# EAGLE board main (EAGLE 5.11)
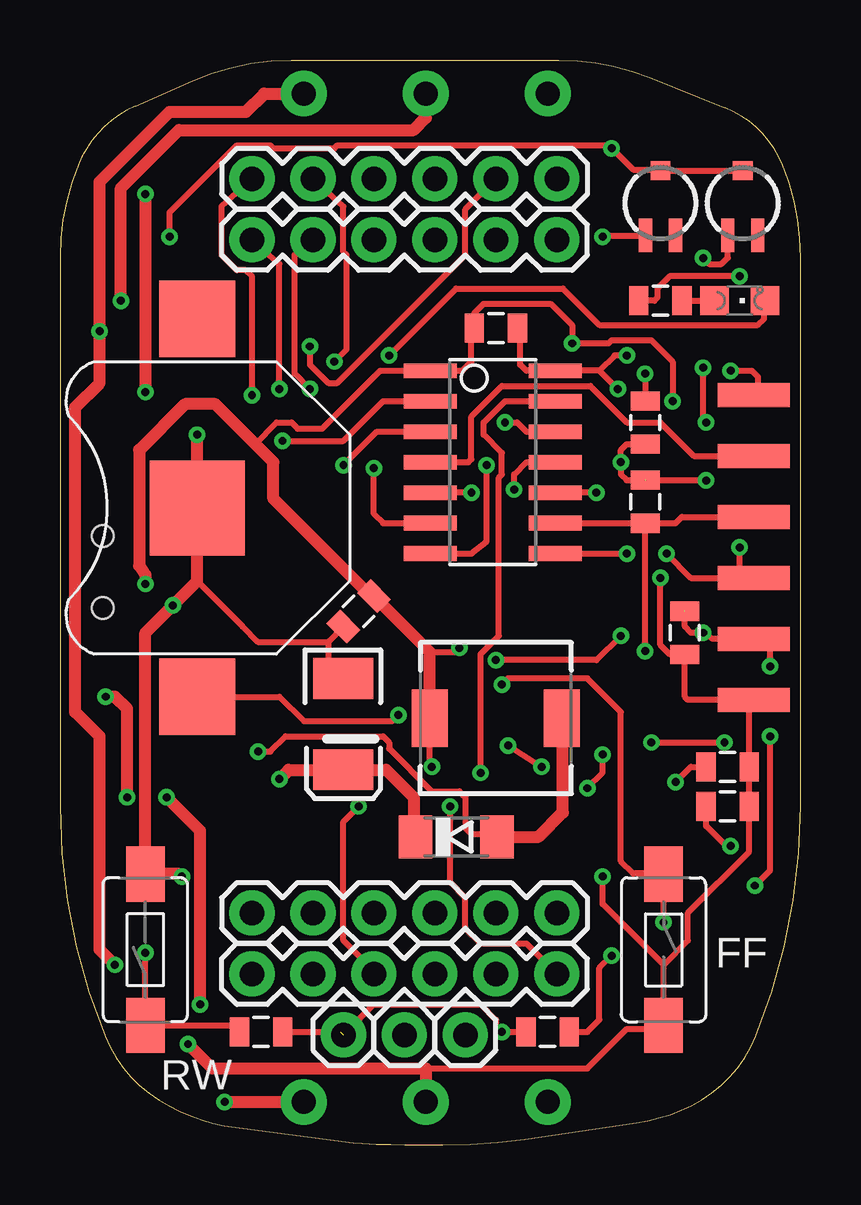
[diagram p0: board, top side]
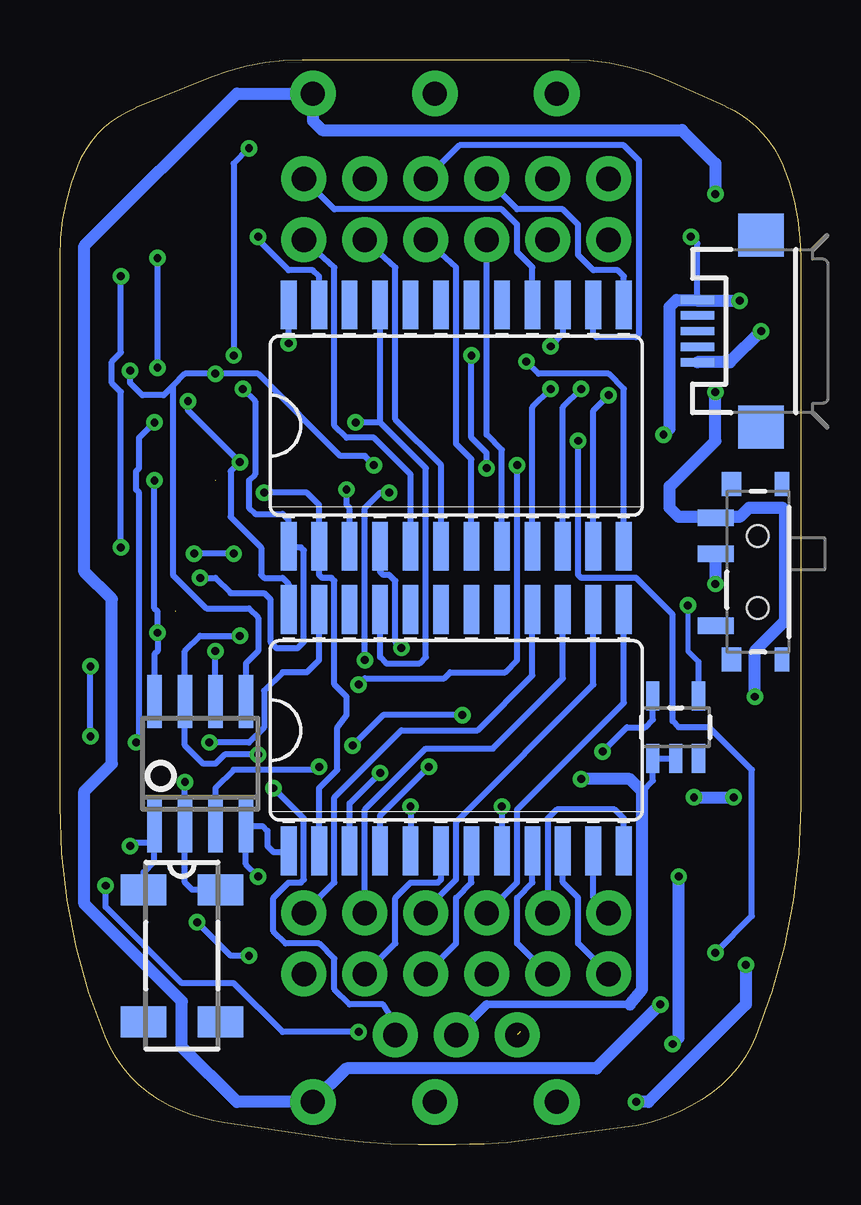
[diagram p1: board, bottom side, seen from below]

Size 30.86 x 45.21 mm. Coordinates in mm from the lower left corner, seen from the top.
Outline: 0.75,40.83 arc22 0,37 0,14.1 arc22 1.88,4.51 arc41 4.55,1.62 arc19 6.85,0.79 12.22,0.09 12.59,0.05 arc4 14.38,0 15.94,0 arc7 19.37,0.22 24.01,0.92 arc19 26.31,1.62 arc41 28.98,4.51 arc22 30.86,14.1 30.86,37 arc22 30.11,40.83 arc46 27.7,43.22 24.55,44.48 arc22 20.78,45.21 9.64,45.21 arc24 5.53,44.34 3.13,43.28 arc44 0.75,40.83
Copper layers (1*16): Top 0.0356mm / dielectric 1.5011mm / Bottom 0.0356mm
Design rules "LaenPCBOrder *": minimum track width 6mil, minimum drill 13mil, track to track 6mil, track to pad 6mil, pad to pad 6mil, via to via 6mil, smd to smd 6mil, copper to edge 15mil, drill to drill 6mil, minimum pad ring 7mil, minimum via ring 7mil, stop-mask expansion 4mil, vias tented up to drill 14mil, thermal gap 10mil

## Footprints (pad centres in the part's own frame; a part is rotated, then mirrored left to right if it is on the bottom)
BATTCON_12MM = smd 3.962 x 3.962: GND 0,0 | smd 3.175 x 3.175: PWR@1 -7.874,0; PWR@2 7.874,0
0805 = smd 0.8 x 1.2: 1 -0.9,0; 2 0.9,0
EIA3528-KIT = smd 1.7 x 2.5: A 1.9,0; C -1.9,0
SOD80C = smd 1.4 x 1.8: A 1.7,0; C -1.7,0
SOIC14 = smd 0.61 x 2.21: 1 -3.81,-2.603; 2 -2.54,-2.603; 3 -1.27,-2.603; 4 0,-2.603; 5 1.27,-2.603; 6 2.54,-2.603; 7 3.81,-2.603; 8 3.81,2.603; 9 2.54,2.603; 10 1.27,2.603; 11 0,2.603; 12 -1.27,2.603; 13 -2.54,2.603; 14 -3.81,2.603
SO-08 = smd 0.6 x 2.2: 1 -1.905,-2.6; 2 -0.635,-2.6; 3 0.635,-2.6; 4 1.905,-2.6; 5 1.905,2.6; 6 0.635,2.6; 7 -0.635,2.6; 8 -1.905,2.6
SO24L = smd 0.66 x 2.032: 1 -6.985,-5.029; 2 -5.715,-5.029; 3 -4.445,-5.029; 4 -3.175,-5.029; 5 -1.905,-5.029; 6 -0.635,-5.029; 7 0.635,-5.029; 8 1.905,-5.029; 9 3.175,-5.029; 10 4.445,-5.029; 11 5.715,-5.029; 12 6.985,-5.029; 13 6.985,5.029; 14 5.715,5.029; 15 4.445,5.029; 16 3.175,5.029; 17 1.905,5.029; 18 0.635,5.029; 19 -0.635,5.029; 20 -1.905,5.029; 21 -3.175,5.029; 22 -4.445,5.029; 23 -5.715,5.029; 24 -6.985,5.029
SOT23-5 = smd 0.55 x 1.2: 1 -0.95,-1.3; 2 0,-1.3; 3 0.95,-1.3; 4 0.95,1.3; 5 -0.95,1.3
1X06 = drill 1.016 pad 1.88 round: 1 0,0; 2 2.54,0; 3 5.08,0; 4 7.62,0; 5 10.16,0; 6 12.7,0
1X01 = drill 1.016 pad 1.88 round: 1 0,0
1X06-SMD = smd 1 x 3: 1 -6.35,-0.08; 2 -3.81,-0.08; 3 -1.27,-0.08; 4 1.27,-0.08; 5 3.81,-0.08; 6 6.35,-0.08
B82462G = smd 2.4 x 1.5: P$1 0,2.75; P$2 0,-2.75
CHIPLED_0805 = smd 1.2 x 1.2: A 0,-1.05; C 0,1.05
MC-306 = smd 1.3 x 1.9: 1 -2.75,-1.6; 2 2.75,-1.6; 3 2.75,1.6; 4 -2.75,1.6
PC25 = smd 0.55 x 1.4: 1 -0.625,-1.35; 3 0.625,-1.35 | smd 0.825 x 0.8: 2 0,1.35
TACTILE-SWITCH-1101NE = smd 2.3 x 1.6: P$1 -3.15,0; P$2 3.15,0
SWITCH-SPST-SMD-A = smd 0.7 x 1.5: 1 -2.25,-1.75; 2 -0.75,-1.75; 3 2.25,-1.75 | smd 1 x 0.6: GND1 -3.65,1; GND3 3.65,1 | smd 1 x 0.8: GND2 -3.65,-1.1; GND4 3.65,-1.1 | hole 0.9: -1.5,0; 1.5,0
USB-MICROB = smd 0.35 x 1.4: D+ 0,2.65; D- -0.65,2.65; GND 1.3,2.65; ID 0.65,2.65; VBUS -1.3,2.65 | smd 1.8 x 1.9: MT1 -4,0; MT2 4,0

## Placement (x,y rotation side)
BAT1  [BATTCON_12MM]  5.71,26.54 90 top
C1  12pF  [0805]  27.81,15.75 0 top
C2  12pF  [0805]  27.81,14.1 0 top
C3  10uF  [0805]  18.16,34.04 0 top
C4  10uF  [0805]  26.04,21.34 90 top
C5  68UF  [EIA3528-KIT]  11.81,17.53 270 top
C6  [0805]  12.45,22.23 225 top
D1  [SOD80C]  16.51,12.83 0 top
IC1  TINY24/44/84-SSU  [SOIC14]  18.03,28.45 270 top
IC2  X1205IS8  [SO-08]  25.02,15.88 0 bottom
IC3  [SO24L]  14.35,17.27 0 bottom
IC4  [SO24L]  14.35,29.97 0 bottom
IC7  [SOT23-5]  5.21,17.4 0 bottom
JP1  [1X06]  20.7,7.11 180 top
JP2  [1X06]  8,9.65 0 top
JP3  [1X06]  20.7,37.72 180 top
JP4  [1X06]  8,40.26 0 top
JP10  M01PTH  [1X01]  14.35,4.57 0 top
JP12  M01PTH  [1X01]  11.81,4.57 0 top
JP13  M01PTH  [1X01]  16.89,4.57 0 top
JP15  [1X06-SMD]  28.83,24.89 90 top
L1  [B82462G]  18.16,17.78 90 top
LEDSTATUS  [CHIPLED_0805]  28.32,35.18 270 top
Q1  [MC-306]  25.78,7.87 270 bottom
R1  [PC25]  28.45,39.24 0 top
R2  [PC25]  25.02,39.24 0 top
RPULLUP1  4.7K  [0805]  24.38,26.8 90 top
RPULLUP2  4.7K  [0805]  24.38,30.1 270 top
RPULLUP3  4.7K  [0805]  8.38,4.7 180 top
RPULLUP4  4.7K  [0805]  20.32,4.7 180 top
RSTATUS  460  [0805]  25.02,35.18 0 top
S1  SWITCH-MOMENTARY-2-SMD-1101NE  [TACTILE-SWITCH-1101NE]  3.56,8.13 90 top
S2  SWITCH-MOMENTARY-2-SMD-1101NE  [TACTILE-SWITCH-1101NE]  25.15,8.13 270 top
S3  [SWITCH-SPST-SMD-A]  1.78,23.88 270 bottom
X1  USB-MICROB  [USB-MICROB]  1.65,33.91 90 bottom

## Library data of the parts
BAT1 C1-C6 IC7 JP1-JP4 JP10 JP12 JP13 L1 RPULLUP1-RPULLUP4 RSTATUS S1-S3 X1 = SparkFun
D1 = diode
IC1 = avr-7
IC2 = RyanK; OC_FARNELL: unknown; OC_NEWARK: unknown
IC3 IC4 JP15 R1 R2 = RyanK
LEDSTATUS = led
Q1 = crystal; MPN: MC-306 60.0KHZ 100PPM ,12.5PF; OC_FARNELL: 1278040; OC_NEWARK: 31M5576

## Nets
1HZ: IC1.5 IC2.7 JP13.1
BATBACKUP: BAT1.PWR@1 IC2.3
FF: IC1.3 RPULLUP4.1 S2.P$1
GND: BAT1.GND C1.2 C2.2 C3.2 C4.1 C5.C C6.2 IC1.14 IC2.4 IC3.1 IC4.1 IC7.4 JP15.1 R1.2 R2.2 S1.P$2 S2.P$2 X1.GND
HOURCLOCK: IC1.11 IC4.3
MINUTECLOCK: IC1.13 IC3.3
MISO: IC1.8 JP15.3 RSTATUS.1
N$1: D1.A IC7.5 L1.P$2
N$2: IC3.5 JP1.1
N$3: IC3.6 JP1.2
N$4: C2.1 IC2.1 Q1.1
N$5: IC3.7 JP1.3
N$6: IC3.8 JP1.4
N$7: IC3.9 JP1.5
N$12: IC3.10 JP1.6
N$13: IC3.11 JP2.1
N$14: IC3.12 JP2.2
N$15: IC3.13 JP2.3
N$17: IC3.14 JP2.4
N$18: IC3.15 JP2.5
N$19: IC3.16 JP2.6
N$20: IC4.5 JP3.1
N$21: IC4.6 JP3.2
N$22: IC4.7 JP3.3
N$23: IC4.8 JP3.4
N$24: IC4.9 JP3.5
N$25: IC4.10 JP3.6
N$26: IC4.11 JP4.1
N$27: IC4.12 JP4.2
N$28: IC4.13 JP4.3
N$29: IC4.14 JP4.4
N$30: IC4.15 JP4.5
N$31: IC4.16 JP4.6
N$56: IC3.23 R1.1
N$57: C1.1 IC2.2 Q1.4
N$58: IC1.6 LEDSTATUS.C
N$59: LEDSTATUS.A RSTATUS.2
N$60: S3.1
N$62: IC4.23 R2.1
OE: IC1.12 IC3.21 IC4.21
RESET: IC1.4 JP15.5
RW: IC1.2 RPULLUP3.2 S1.P$1
SCL: IC1.9 IC2.6 JP15.4 RPULLUP1.1
SDA: IC1.7 IC2.5 JP15.6 RPULLUP2.1
SERIALOUT: IC1.10 IC3.2 IC4.2
VCC: C5.A D1.C IC7.1 IC7.2 JP10.1
VRAWSWITCHED: C3.1 C4.2 C6.1 IC1.1 IC2.8 IC3.4 IC3.24 IC4.4 IC4.24 JP12.1 JP15.2 L1.P$1 RPULLUP1.2 RPULLUP2.2 RPULLUP3.1 RPULLUP4.2 S3.2
VUSB: X1.VBUS

## Tracks (layer width: path | path; a pad name or v marks a point on that pad's centre or on a via)
1HZ  (via drill 0.33)
  Top 0.254: v23.37,21.21 22.35,20.19 v18.16,20.19 | v17.14,27.18 IC1.5 | v21.97,14.86 22.61,15.49 v22.61,16.26
  Bottom 0.254: v23.37,21.21 25.02,21.21 25.65,20.57 IC2.7 25.65,16.64 24.89,15.88 24.38,15.88 24,16.26 v22.61,16.26 | v17.14,27.18 17.53,27.18 18.16,26.54 v18.16,20.19 | JP13.1 16.89,5.08 17.4,5.84 18.8,5.84 19.43,6.48 19.43,7.75 20.07,8.38 21.46,8.38 21.97,8.89 21.97,10.29 21.34,10.92 20.83,10.92 20.7,11.05 20.7,13.59 v21.97,14.86
BATBACKUP  (via drill 0.33)
  Top 0.254: BAT1.PWR@1 9.14,18.67 10.16,17.65 13.84,17.65 v14.1,17.91 | v18.67,16.64 v20.07,15.75
  Bottom 0.254: v14.1,17.91 17.4,17.91 v18.67,16.64 | v20.07,15.75 20.19,15.62 23.62,15.62 24.38,14.86 IC2.3
FF  (via drill 0.33)
  Top 0.254: IC1.3 13.21,29.72 v11.81,28.32 | RPULLUP4.1 21.97,4.7 22.48,5.21 22.48,7.37 v22.99,7.87 | v25.15,9.27 S2.P$1 25.12,11.3 23.88,11.3 23.37,11.81 23.37,18.03 21.97,19.43 18.67,19.43 v18.41,19.18
  Bottom 0.254: v11.81,28.32 11.81,20.19 12.32,19.68 14.61,19.68 14.86,19.43 18.16,19.43 v18.41,19.18 | v22.99,7.87 23.75,7.87 v25.15,9.27
GND  (via drill 0.33, 1 pad 1.91)
  Top 0.254: C3.2 19.18,33.92 19.18,32.51 19.43,32.26 IC1.14 22.48,32.26 | v22.61,11.18 22.61,10.03 25.15,7.49 | 22.48,32.26 v23.24,31.5 | v25.02,23.62 25.02,20.83 25.41,20.44 C4.1 26.04,18.67 26.16,18.54 JP15.1 28.71,18.35 C1.2 C2.2 28.71,12.2 26.16,9.65 26.16,8.51 25.15,7.49 | 5.71,23.5 6.48,22.73 7.61,21.59 8.24,20.95 11.18,20.95 | 15.24,3.17 21.97,3.17 23.62,4.83 24.99,4.83 S2.P$2 25.15,7.49 | v5.08,11.18 4.98,11.28 | v4.57,37.85 4.57,38.86 7.37,41.66 8.76,41.66 8.89,41.53 11.43,41.53 11.56,41.66 22.86,41.66 v22.99,41.53 23.88,40.64 24.97,40.64 R2.2 R1.2 | 11.18,20.95 C6.2 | 11.18,20.95 11.18,19.94 | v23.62,32.89 23.11,32.89 22.48,32.26
  Top 0.508: C6.2 11.93,21.45 | C5.C 11.94,19.81 11.81,19.94 11.18,19.94 | v5.71,29.59 BAT1.GND 5.71,23.5 v4.7,22.48 3.56,21.34 S1.P$2 4.98,11.28 | v5.33,4.19 6.35,3.17 15.24,3.17 v15.24,1.78 | v2.54,35.18 2.54,39.88 4.95,42.29 14.73,42.29 15.24,42.8 v15.24,43.81
  Bottom 0.203: 4.26,20.13 4.7,20.57 v4.7,22.48
  Bottom 0.254: IC3.1 21.39,12.19 21.97,12.19 22.23,12.45 22.23,13.08 22.42,13.28 IC2.4 23.11,11.68 v22.61,11.18 | v23.24,31.5 22.73,30.99 22.73,27.94 22.99,27.69 22.99,26.54 22.73,26.29 21.59,26.29 21.34,26.04 IC4.1 21.29,24.89 20.83,24.89 20.7,24.77 20.7,20.95 20.95,20.7 21.84,20.7 22.1,20.95 22.1,22.73 22.35,22.99 23.75,22.99 24.38,23.62 v25.02,23.62 | 4.26,20.13 IC7.4 | v4.57,37.85 4.3,37.58 X1.GND | v23.62,32.89 23.62,40.89 v22.99,41.53
  Bottom 0.508: v5.71,29.59 5.46,29.84 5.46,34.92 5.18,35.21 X1.GND 4.27,35.18 v2.54,35.18 2.57,35.21 | v5.33,4.19 5.08,4.45 v5.08,11.18
HOURCLOCK  (via drill 0.33)
  Top 0.254: IC1.11 19.43,28.45 18.92,27.94 v18.92,27.3
  Bottom 0.254: v18.92,27.3 18.92,26.67 18.8,26.54 IC4.3
MINUTECLOCK  (via drill 0.33)
  Top 0.254: IC1.13 18.54,30.99 17.65,30.1 17.65,29.59 18.41,28.83 18.41,27.94 18.29,27.81 18.29,21.21 17.53,20.45 v17.53,15.49
  Bottom 0.254: IC3.3 18.8,14.22 v17.53,15.49
MISO  (via drill 0.33)
  Top 0.254: IC1.8 v23.62,24.64 | v25.27,24.64 26.29,23.62 JP15.3 | RSTATUS.1 24.77,35.18 24.89,35.31 24.89,35.69 25.4,36.2 v28.32,36.2 | JP15.3 28.32,23.62 v28.32,24.89 | JP15.3 29.97,23.62
  Bottom 0.254: v23.62,24.64 v25.27,24.64 | v28.32,36.2 28.32,33.02 28.7,32.64 28.7,31.75 28.32,31.37 v28.32,24.89
N$1  (via drill 0.33)
  Top 0.254: v8.26,16.38 8.76,16.38 9.4,17.02 13.46,17.02 13.72,16.76 13.72,16.51 15.49,14.73 16.64,14.73 16.89,14.48 16.89,13.21 17.14,12.95 18.08,12.95 D1.A
  Top 0.508: L1.P$2 20.95,17.74 20.95,13.84 19.94,12.83 D1.A
  Bottom 0.254: IC7.5 6.16,17.72 6.48,17.4 7.24,17.4 v8.26,16.38
N$2  (via drill 0.33)
  Top 0.254: v16.26,14.1 16.26,10.92 16.89,10.29 16.89,9.02 17.53,8.38 19.43,8.38 JP1.1
  Bottom 0.254: v16.26,14.1 IC3.5
N$3
  Bottom 0.254: IC3.6 14.99,11.05 15.11,10.92 16.26,10.92 16.89,10.29 16.89,8.38 JP1.2
N$4  (via drill 0.33)
  Top 0.254: C2.1 26.92,14.09 IC2.1 27.75,12.45 v27.94,12.45
  Bottom 0.254: Q1.1 27.38,11.35 26.92,11.81 26.92,12.57 | 26.92,12.57 IC2.1 | v27.94,12.45 27.81,12.57 26.92,12.57
N$5
  Bottom 0.254: IC3.7 13.72,10.92 14.35,10.29 14.35,8.38 JP1.3
N$6  (via drill 0.33)
  Top 0.254: v12.45,14.1 11.81,13.46 11.81,8.51 13.08,7.24 JP1.4
  Bottom 0.254: v12.45,14.1 IC3.8
N$7
  Bottom 0.254: IC3.9 11.18,10.92 11.81,10.29 11.81,8.38 JP1.5
N$12
  Bottom 0.254: IC3.10 9.91,10.92 9.27,10.29 9.27,8.38 JP1.6
N$13
  Bottom 0.254: JP2.1 8.64,10.29 IC3.11
N$14
  Bottom 0.254: JP2.2 10.54,13.59 10.16,13.97 7.75,13.97 7.37,13.59 IC3.12
N$15
  Bottom 0.254: JP2.3 11.81,10.92 11.81,13.97 7.37,18.41 IC3.13
N$17
  Bottom 0.254: JP2.4 15.62,9.78 14.35,11.05 14.35,13.46 8.64,19.18 IC3.14
N$18
  Bottom 0.254: JP2.5 18.16,13.97 15.62,16.51 12.83,16.51 9.91,19.43 IC3.15
N$19
  Bottom 0.254: JP2.6 19.43,10.92 19.43,14.48 16.64,17.27 13.46,17.27 11.18,19.56 IC3.16
N$20
  Bottom 0.254: JP3.1 19.43,36.58 19.43,29.97 18.92,29.46 17.78,29.46 16.26,27.94 IC4.5
N$21
  Bottom 0.254: JP3.2 16.89,36.58 16.89,30.23 14.99,28.32 IC4.6
N$22
  Bottom 0.254: JP3.3 14.35,36.58 14.35,29.21 13.72,28.57 IC4.7
N$23
  Bottom 0.254: JP3.4 13.08,29.59 12.45,28.96 IC4.8
N$24  (via drill 0.33)
  Top 0.254: JP3.5 10.41,37.72 9.78,37.08 9.78,32.13 v10.41,31.5
  Bottom 0.254: v10.41,31.5 11.18,30.73 IC4.9
N$25  (via drill 0.33)
  Top 0.254: JP3.6 9.14,36.7 v9.14,31.5
  Bottom 0.254: v9.14,31.5 9.91,30.73 IC4.10
N$26  (via drill 0.33)
  Top 0.254: v8,31.24 8,36.2 7.75,36.45 7.37,36.45 6.73,37.08 6.73,39.12 JP4.1
  Bottom 0.254: v8,31.24 8.64,30.61 IC4.11
N$27  (via drill 0.33)
  Top 0.254: JP4.2 11.81,39.12 11.81,37.21 11.94,37.08 11.94,33.15 v11.43,32.64
  Bottom 0.254: IC4.12 7.37,31.5 8,32.13 10.92,32.13 v11.43,32.64
N$28
  Bottom 0.254: IC4.13 7.37,36.2 7.62,36.45 8.64,36.45 9.27,37.08 9.27,38.35 9.91,38.99 11.81,38.99 JP4.3
N$29
  Bottom 0.254: JP4.4 14.22,41.66 7.37,41.66 6.73,41.02 6.73,33.78 6.86,33.66 8.51,33.66 8.64,33.78 IC4.14
N$30  (via drill 0.33)
  Top 0.254: JP4.5 16.89,38.99 16.89,37.08 11.56,31.75 11.18,31.75 10.41,32.51 v10.41,33.27
  Bottom 0.254: v10.41,33.27 9.91,33.78 IC4.15
N$31
  Bottom 0.254: JP4.6 19.43,38.99 12.45,38.99 11.81,38.35 11.81,37.21 11.18,36.58 IC4.16
N$56  (via drill 0.33)
  Top 0.254: R1.1 27.82,36.97 27.56,36.7 27.05,36.7 v26.8,36.96 | v26.8,32.38 26.8,30.23 v26.92,30.1 | v24.64,16.76 v27.69,16.76
  Bottom 0.254: v26.8,32.38 v26.8,36.96 | v26.92,30.1 27.56,29.46 27.56,28.19 27.69,28.07 27.69,27.3 27.56,27.18 27.56,16.89 v27.69,16.76 | v24.64,16.76 22.99,16.76 22.35,17.4 22.35,18.92 21.59,19.68 20.57,19.68 20.07,20.19 IC3.23
N$57  (via drill 0.33)
  Top 0.254: v25.65,15.11 26.29,15.75 C1.1
  Bottom 0.254: Q1.4 25.36,10.62 25.65,10.92 IC2.2 v25.65,15.11
N$58  (via drill 0.33)
  Top 0.254: IC1.6 13.46,25.91 13.08,26.29 v13.08,28.19 | v13.72,32.89 16.51,35.69 20.95,35.69 22.48,34.16 29.08,34.16 29.34,34.42 29.34,35.15 LEDSTATUS.C
  Bottom 0.254: v13.08,28.19 13.08,28.83 13.72,29.46 v13.72,32.89
N$59
  Top 0.254: RSTATUS.2 LEDSTATUS.A
N$60  (via drill 0.33, 1 pad 1.91)
  Top 0.508: v2.79,14.48 2.79,18.16 2.29,18.67 v1.91,18.67 | v4.45,14.48 5.84,13.08 v5.84,5.84 | v3.56,39.62 v3.56,31.37
  Bottom 0.508: 3.44,26.16 3.49,26.16 S3.1 | 3.44,26.16 S3.1 | v4.45,14.48 v2.79,14.48 | v1.91,18.67 1.91,20.57 0.64,21.84 0.64,26.42 0.76,26.54 2.16,26.54 2.54,26.16 3.44,26.16 | v5.84,5.84 8.51,3.17 18.92,3.17 v20.32,1.78 23.5,1.78 25.78,4.06 25.78,5.97 29.84,10.03 29.84,14.73 28.7,15.88 28.7,22.73 29.84,23.88 29.84,37.47 23.5,43.81 v20.32,43.81 20.32,42.67 19.94,42.29 4.95,42.29 3.56,40.89 v3.56,39.62 | v3.56,31.37 3.56,29.34 5.46,27.43 5.46,26.54 5.08,26.16 3.56,26.16 S3.1
N$62  (via drill 0.33)
  Top 0.254: R2.1 22.65,37.89 v22.61,37.85
  Bottom 0.254: v22.61,37.85 22.61,37.72 21.34,36.45 20.32,36.45 20.07,36.2 IC4.23
OE  (via drill 0.33)
  Top 0.254: v18.54,30.1 19.05,30.1 19.43,29.72 IC1.12
  Bottom 0.254: 17.53,30.1 15.62,28.19 15.62,20.32 15.88,20.07 17.27,20.07 17.53,20.32 IC3.21 | 17.53,30.1 IC4.21 | 17.53,30.1 v18.54,30.1
RESET
  Top 0.254: IC1.4 17.02,28.45 17.14,28.57 17.14,30.35 18.41,31.62 22.1,31.62 23.62,30.1 25.02,30.1 26.42,28.7 JP15.5
RW  (via drill 0.33)
  Top 0.254: RPULLUP3.2 7.2,4.98 S1.P$1 v3.56,8 | IC1.2 13.46,30.99 11.81,29.34 v9.27,29.34
  Bottom 0.254: v9.27,29.34 9.27,23.75 9.14,23.62 6.86,23.62 5.33,22.1 5.33,17.65 5.08,17.4 3.81,17.4 2.03,15.62 2.03,9.53 v3.56,8
SCL  (via drill 0.33)
  Top 0.254: IC1.9 20.65,25.9 RPULLUP1.1 | RPULLUP1.1 24.65,26.16 | v24.38,20.57 RPULLUP1.1 | RPULLUP1.1 24.39,25.91 25.65,25.91 25.91,26.16 JP15.4
  Bottom 0.254: IC2.6 v24.38,20.57
SDA  (via drill 0.33)
  Top 0.254: IC1.7 17.14,24.64 17.78,25.15 v17.78,28.32 | v24.38,32.13 RPULLUP2.1 | v27.94,32.26 28.83,32.26 29.08,32 29.08,31.29 JP15.6
  Bottom 0.254: v17.78,28.32 18.16,28.7 19.18,28.7 22.61,32.13 v24.38,32.13 25.65,32.13 26.16,31.62 | IC2.5 23.11,20.07 22.61,20.57 22.61,21.97 22.99,22.35 24.77,22.35 26.16,23.75 26.16,31.62 | 26.16,31.62 26.54,31.24 27.43,31.24 27.94,31.75 v27.94,32.26
SERIALOUT  (via drill 0.33)
  Top 0.254: v22.35,27.18 IC1.10
  Bottom 0.254: v22.35,27.18 20.57,27.18 20.07,26.67 IC4.2 20.07,23.75 19.94,23.62 19.56,23.62 19.43,23.5 19.43,19.18 18.92,18.67 18.92,17.91 19.3,17.4 19.3,15.62 20.07,14.86 IC3.2
VCC  (via drill 0.33)
  Top 0.508: D1.C 14.73,12.9 14.73,14.48 13.58,15.63 C5.A 9.53,15.63 v9.14,15.24
  Bottom 0.254: IC7.2 IC7.1 6.16,15.18 6.6,14.73
  Bottom 0.305: 7.11,5.84 13.08,5.84
  Bottom 0.356: 13.08,5.84 JP10.1
  Bottom 0.508: 7.11,5.84 6.6,6.48 6.6,14.73 7.11,15.24 v9.14,15.24
VRAWSWITCHED  (via drill 0.33)  (3 unrouted)
  Top 0.254: RPULLUP3.1 11.68,4.7 | C3.1 17.14,33.92 17.14,33.53 | C3.1 17.26,34.66 17.65,35.05 20.45,35.05 21.34,34.16 v21.34,33.4 22.86,33.4 22.99,33.53 24.64,33.53 25.53,32.64 v25.53,30.99 | C3.1 17.26,33.64 17.14,33.53 | 17.14,33.53 17.14,32.64 16.76,32.26 IC1.1 13.34,32.26 10.92,29.84 9.91,29.84 9.65,30.1 9.02,30.1 8.13,29.21 | v26.8,21.34 27.18,21.08 JP15.2 29.59,21.08 v29.59,19.94 | v26.8,21.34 26.92,21.35 | v26.8,21.34 26.29,21.34 26.04,21.59 26.04,22.23 | v26.92,27.69 24.39,27.69 | v28.96,10.79 29.59,11.43 v29.59,17.02 | JP12.1 13.08,5.84 17.53,5.84 18.16,5.21 18.16,4.95 v18.41,4.7 RPULLUP4.2 | RPULLUP2.2 23.61,29.2 23.37,28.96 v23.37,28.45 23.37,27.94 23.61,27.7 RPULLUP1.2 | 12.95,22.86 C6.1 | v15.49,15.75 15.41,15.83 L1.P$1 | v16.64,20.7 16.47,20.53 15.41,20.53
  Top 0.508: L1.P$1 15.41,20.53 13.97,21.97 C6.1 | 12.95,22.86 8.89,26.92 8.89,28.45 8.13,29.21 6.48,30.86 5.21,30.86 3.3,28.96 3.3,24.13 3.56,23.75 v3.56,23.37
  Bottom 0.254: v25.53,30.99 25.53,30.61 v23.37,28.45 23.75,28.07 23.75,26.16 22.48,24.89 22.48,23.75 22.35,23.62 21.59,23.62 21.34,23.37 IC3.24 | v26.92,27.69 26.92,22.35 26.8,22.23 v26.8,21.34 26.8,20.57 26.92,20.45 IC2.8 | v21.34,33.4 IC4.24 21.34,35.18 | v29.59,17.02 v29.59,19.94 | v28.96,10.79 28.96,9.91 25.78,6.73 23.62,6.73 21.59,4.7 v18.41,4.7 | IC3.4 17.53,13.72 v15.49,15.75 | IC4.4 17.53,23.88 17.4,23.75 17.14,23.75 16.89,23.5 16.89,20.95 v16.64,20.7
  Bottom 0.508: S3.2 3.53,23.4 v3.56,23.37
VUSB  (via drill 0.33, 1 pad 1.91)
  Top 0.508: v2.29,7.49 1.65,8.13 1.65,17.02 0.64,18.03 0.64,30.73 1.65,31.75 v1.65,33.91 1.65,40.13 4.57,43.05 7.75,43.05 8.51,43.81 v10.16,43.81 | v6.86,1.78 v10.16,1.78
  Bottom 0.508: X1.VBUS 2.95,32.61 v1.65,33.91 | v6.86,1.78 6.35,1.78 2.29,5.84 v2.29,7.49

## Text on the board
_tsilk: FF | RW